# Altium PCB TrashFullnessSensor1.0.0.PcbDoc
Units mm, origin at the board's own origin, x right, y up, seen from the top; angles counter-clockwise.
Board outline 60.5 x 40.5 mm, 2 copper layers (Top Layer, Bottom Layer), stack 1.035 mm thick; 92 components, 82 nets, 263 pads, 87 vias.
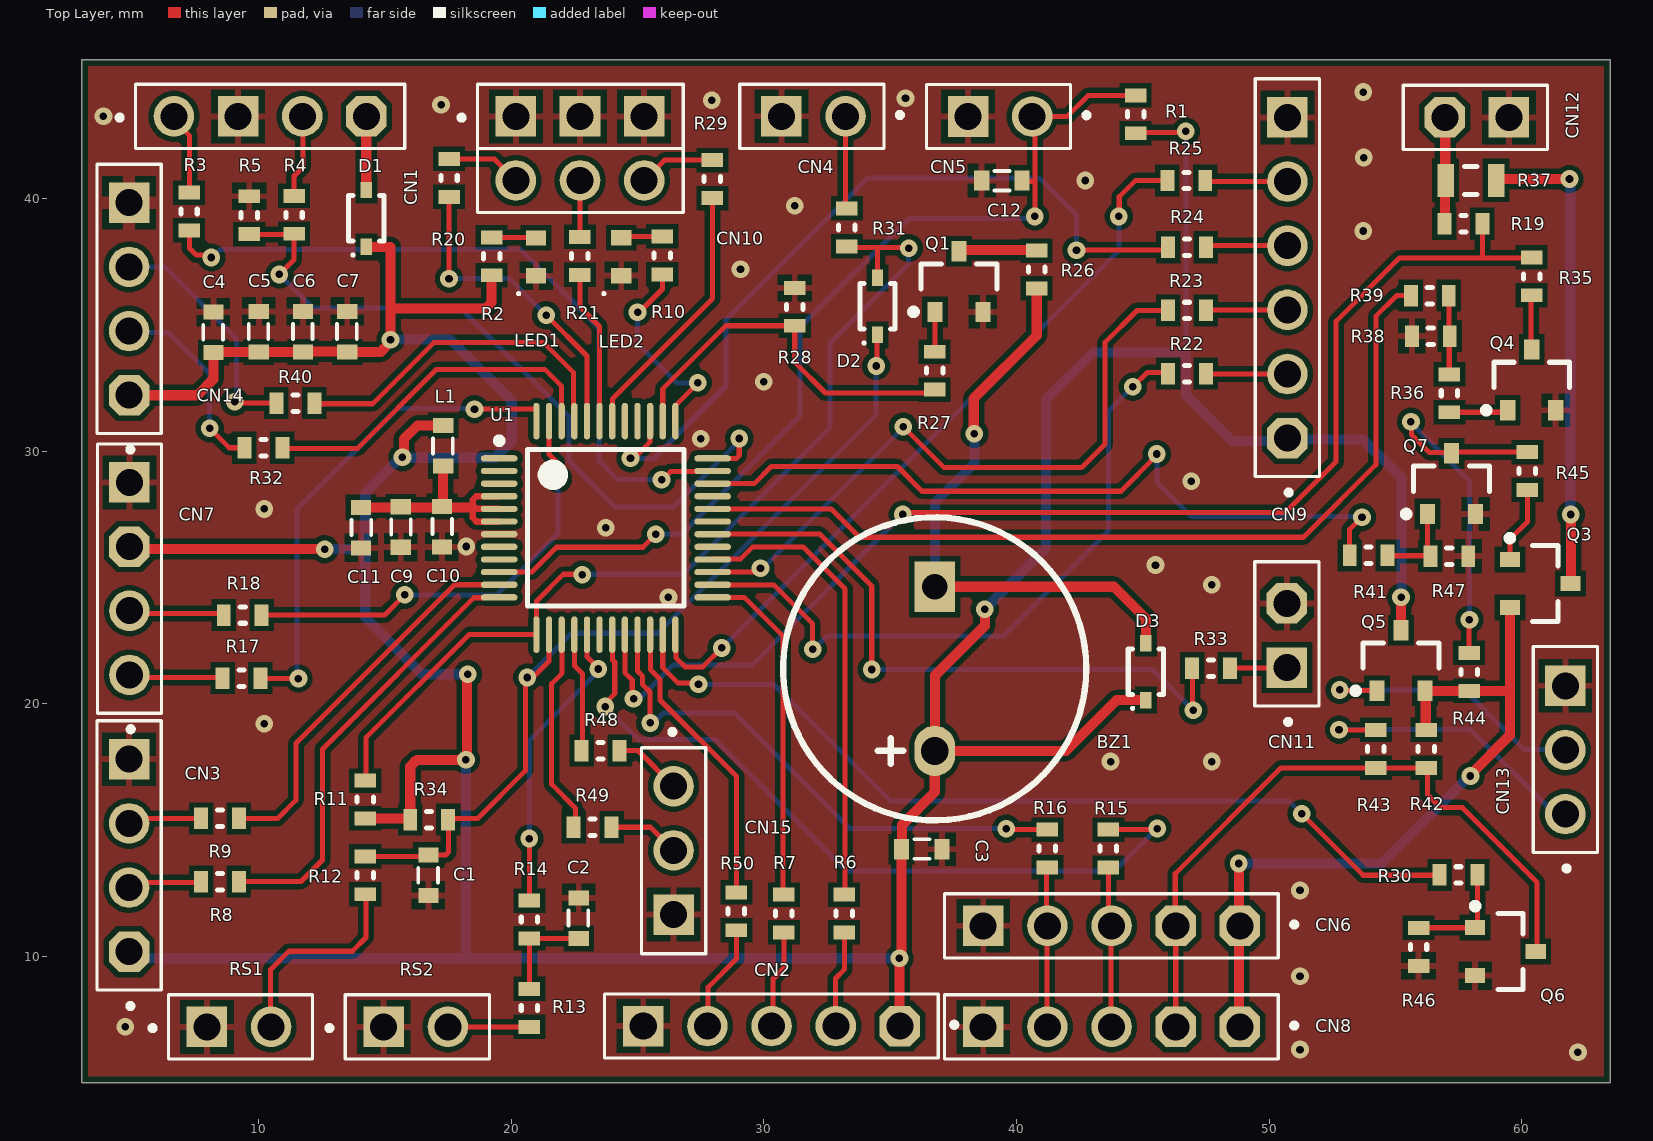
[diagram p0: Top Layer view]
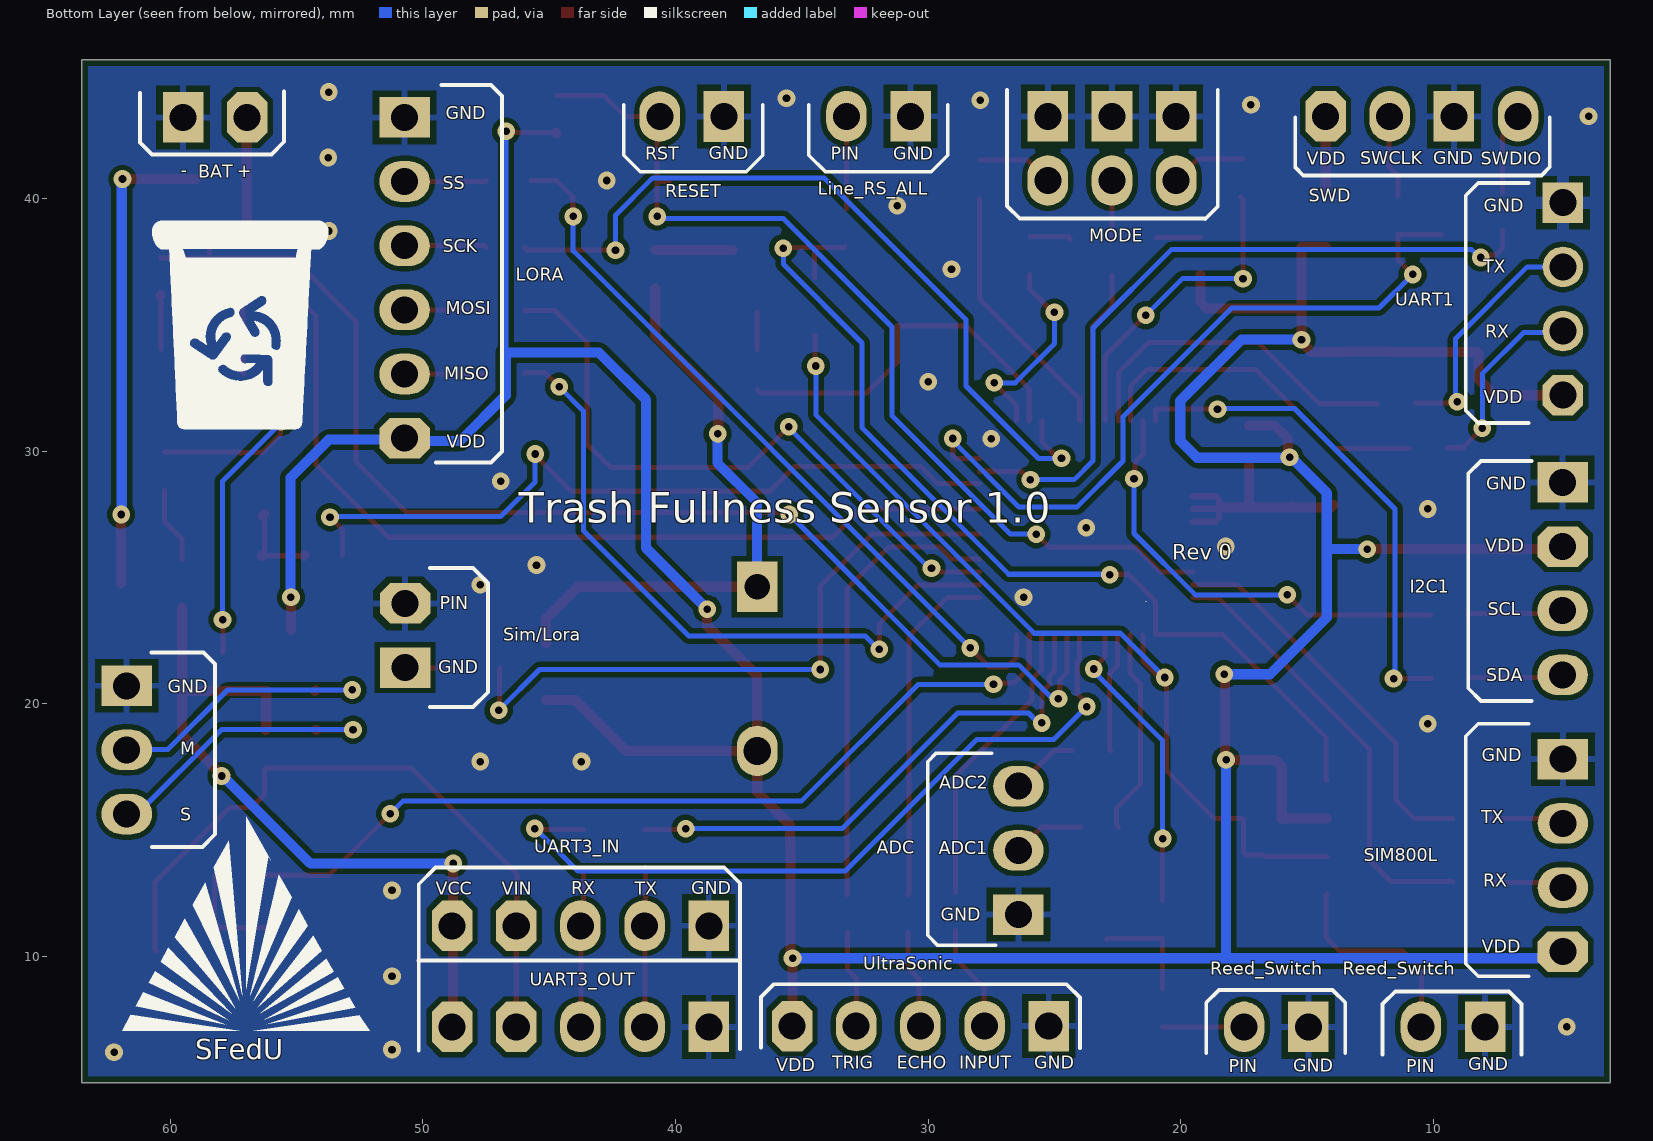
[diagram p1: Bottom Layer view, seen from below]

## Layer stack, top to bottom
Top Solder: solder mask 0.0102, Solder Resist, Dk 3.5
Top Layer: signal copper 0.0175
Dielectric 1: dielectric 1, FR-4, Dk 4.8
Bottom Layer: signal copper 0.0175
Bottom Solder: solder mask 0.0102, Solder Resist, Dk 3.5

## Board outline
3,5 3,45.5 63.5,45.5 63.5,5

## Design rules (kind name [scope] priority, off if disabled: settings)
BoardOutlineClearance [All] p1: gap=0.254 ignorepadtopadclearanceinfootprint=FALSE except(0: Arc-SplitContinuation Track-SplitContinuation SMDPad-SplitContinuation THPad-SplitContinuation Via-SplitContinuation Fill-SplitContinuation Poly-SplitContinuation Region-SplitContinuation Text-SplitContinuation)
Clearance [All] p1: gap=0.2 ignorepadtopadclearanceinfootprint=FALSE except(0: Arc-Hole Track-Hole SMDPad-Hole THPad-Hole Via-Hole Fill-Hole Poly-Hole Region-Hole Text-Hole)
ComponentClearance [All] p1: gap=0.5 collisioncheckmode=3 verticalgap=0.5 showdistances=FALSE
HoleSize [All] p1: absolutevalues=TRUE maxlimit=2.54 minlimit=0.3 maxpercent=80.000 minpercent=20.000
MinimumSolderMaskSliver [All] p1: minsoldermaskwidth=0.15
PolygonConnect PolygonConnect_BIG [IsPad And ( (AsMM(PadXSize_AllLayers)>1) Or (AsMM(PadYSize_AllLayers)>1) )] p1: connectstyle=Relief reliefconductorwidth=0.5 reliefentries=4 polygonreliefangle="90 Angle" airgapwidth=0.254
PolygonConnect PolygonConnect_VIA [IsVia] p2: connectstyle=Direct reliefconductorwidth=0.254 reliefentries=4 polygonreliefangle="90 Angle" airgapwidth=0.254
PolygonConnect [All] p3: connectstyle=Relief reliefconductorwidth=0.254 reliefentries=4 polygonreliefangle="90 Angle" airgapwidth=0.254
RoutingVias [All] p1: holewidth=0.3 width=0.7 viastyle="Through Hole" minholewidth=0.3 minwidth=0.7 maxholewidth=0.3 maxwidth=0.7
SilkToSolderMaskClearance [IsPad] p1: minsilkscreentomaskgap=0.1 clearancetoexposedcopper=TRUE
SolderMaskExpansion SolderMaskExpansion_VIA [IsVia] p1: expansion=0.102 istentingtop=TRUE
SolderMaskExpansion [All] p2: expansion=0.05 istentingtop=FALSE
UnRoutedNet [All] p1: checkbadconnections=TRUE
Width [All] p1: maxlimit=1 minlimit=0.2 preferedwidth=0.2 minimp=50.000000 maximp=50.000000 favimp=50.000000
25 further rules are at their usual default settings.

## Components (designator, comment, footprint, x,y, rotation, side; value= is the part's Value field where it differs from the comment)
BZ1 "BUZZER" BUZZER 36.763,21.391 r90 top
C1 "Capacitor" Cap_0603 16.722,13.221 r270 top
C2 "Capacitor" Cap_0603 22.672,11.521 r270 top
C3 "Capacitor" Cap_0603 36.25,14.25 r180 top
C4 "" Cap_0603 8.21,34.715 r270 top
C5 "Capacitor" Cap_0603 10.008,34.738 r270 top
C6 "Capacitor" Cap_0603 11.758,34.738 r270 top
C7 "Capacitor" Cap_0603 13.508,34.738 r270 top
C9 "Capacitor" Cap_0603 15.625,27.007 r90 top
C10 "Capacitor" Cap_0603 17.253,27.02 r90 top
C11 "Capacitor" Cap_0603 14.055,26.978 r90 top
C12 "Capacitor" Cap_0603 39.422,40.721 r0 top
CN1 "SWD" PIN_2.54_4_array#1 10.458,43.261 r0 top
CN2 "UltraSonic" Pin_2.54_5_Array#1 30.305,7.253 r180 top
CN3 "SIM800L" PIN_2.54_4_array#2 4.872,14.005 r90 top
CN4 "Line_RS_ALL" PIN_2.54_2_ARRAY#1 31.962,43.263 r180 top
CN5 "RESET" PIN_2.54_2_ARRAY#1 39.351,43.254 r180 top
CN6 "UART3_IN" Pin_2.54_5_Array#2 43.762,11.221 r180 top
CN7 "I2C1" PIN_2.54_4_array#3 4.888,24.962 r90 top
CN8 "UART3_OUT" Pin_2.54_5_Array#2 43.762,7.221 r180 top
CN9 "LORA" Pin_2.54_6_Array 50.722,36.871 r90 top
CN10 "MODE" Pin_2.54_3x2_Array 22.722,41.991 r0 top
CN11 "Sim/Lora" PIN_2.54_2_ARRAY#2 50.7,22.713 r90 top
CN12 "BAT" PIN_2.54_2_ARRAY#2 58.222,43.221 r180 top
CN13 "PIN_ARRAY_3" Pin_2.54_3_Array 61.722,18.181 r90 top
CN14 "UART1" PIN_2.54_4_array#4 4.873,36.032 r90 top
CN15 "ADC" Pin_2.54_3_Array 26.426,14.206 r270 top
D1 "D_SCHOTTKY" Diod_Shottky 14.262,39.221 r90 top
D2 "D_SCHOTTKY" Diod_Shottky 34.496,35.738 r90 top
D3 "D_SCHOTTKY" Diod_Shottky 45.122,21.28 r90 top
L1 "450 mA" Res_0603#1 17.306,30.219 r270 top
LED1 "LED" Led_0603_Red 20.981,37.701 r90 top
LED2 "LED" Led_0603_Red 24.353,37.703 r90 top
Q1 "MOS_N" SOT23-3 37.722,36.721 r90 top
Q3 "MOS_P" SOT23-3 60.727,24.765 r0 top
Q4 "MOS_N" SOT23-3 60.39,32.827 r90 top
Q5 "MOS_P" SOT23-3 55.222,21.721 r90 top
Q6 "MOS_N" SOT23-3 59.352,10.199 r0 top
Q7 "MOS_N" SOT23-3 57.222,28.721 r90 top
R1 "10 k" Res_0603#2 44.715,43.342 r270 top
R2 "300 Om" RES_0603 19.222,37.721 r90 top
R3 "100 Om" RES_0603 7.245,39.494 r270 top
R4 "100 Om" RES_0603 11.403,39.362 r270 top
R5 "10 k" Res_0603#2 9.631,39.347 r270 top
R6 "100 Om" Res_0603#2 33.178,11.707 r270 top
R7 "100 Om" Res_0603#2 30.792,11.707 r270 top
R8 "100 Om" Res_0603#2 8.472,12.971 r180 top
R9 "100 Om" Res_0603#2 8.472,15.471 r180 top
R10 "300 Om" RES_0603 25.977,37.754 r90 top
R11 "100 k" RES_0603 14.222,16.221 r90 top
R12 "300 Om" RES_0603 14.222,13.221 r270 top
R13 "300 Om" RES_0603 20.722,7.971 r270 top
R14 "300 Om" RES_0603 20.722,11.471 r90 top
R15 "100 Om" RES_0603 43.638,14.277 r270 top
R16 "100 Om" RES_0603 41.222,14.282 r270 top
R17 "100 Om" RES_0603 9.322,21.021 r180 top
R18 "100 Om" RES_0603 9.372,23.521 r180 top
R19 "10 k" RES_0603 57.686,39.008 r180 top
R20 "100 Om" RES_0603 17.537,40.824 r270 top
R21 "100 Om" RES_0603 22.714,37.737 r270 top
R22 "100 Om" RES_0603 46.747,33.078 r0 top
R23 "100 Om" RES_0603 46.747,35.578 r0 top
R24 "100 Om" RES_0603 46.747,38.078 r0 top
R25 "100 Om" RES_0603 46.722,40.721 r0 top
R26 "20 Om" RES_0603 40.799,37.196 r90 top
R27 "300 Om" RES_0603 36.76,33.193 r90 top
R28 "51 k" RES_0603 31.222,35.721 r270 top
R29 "100 Om" RES_0603 27.961,40.775 r270 top
R30 "100 Om" RES_0603 57.496,13.234 r0 top
R31 "100 Om" RES_0603 33.285,38.864 r90 top
R32 "100 Om" RES_0603 10.188,30.143 r180 top
R33 "100 Om" RES_0603 47.695,21.419 r0 top
R34 "50 k" RES_0603 16.752,15.425 r180 top
R35 "10 k" RES_0603 60.388,36.929 r90 top
R36 "300 Om" RES_0603 57.137,32.299 r270 top
R37 "1 Om" Res_0805 57.984,40.722 r0 top
R38 "10 k" RES_0603 56.396,34.561 r0 top
R39 "100 Om" RES_0603 56.356,36.162 r180 top
R40 "100 Om" RES_0603 11.458,31.907 r180 top
R41 "100 Om" RES_0603 53.938,25.883 r180 top
R42 "10 k" RES_0603 56.222,18.221 r270 top
R43 "1 k" RES_0603 54.222,18.221 r270 top
R44 "10 k" RES_0603 57.917,21.27 r90 top
R45 "1 k" RES_0603 60.222,29.221 r90 top
R46 "10 k" RES_0603 55.912,10.387 r90 top
R47 "10 k" RES_0603 57.129,25.851 r0 top
R48 "100 Om" RES_0603 23.536,18.156 r0 top
R49 "100 Om" RES_0603 23.222,15.121 r0 top
R50 "100 Om" RES_0603 28.913,11.796 r270 top
RS1 "Reed_Switch" PIN_2.54_2_ARRAY#3 9.222,7.221 r0 top
RS2 "Reed_Switch" PIN_2.54_2_ARRAY#3 16.222,7.221 r0 top
U1 "STM32G070" LQFP48 23.747,26.971 r0 top locked

## Footprints (in the part's own frame and the unit in brackets; to place one, negate y for a bottom-side part, rotate by r counter-clockwise, add the part's x,y. Pads: shape width x height; smd on the part's side, far side on the other; paste and mask are expansions set on the pad)
BUZZER [mm]
  oval 2x1.6 hole 1.1: 1(-3.25,0)
  rect 2x1.6 hole 1: 2(3.25,0)
  silkscreen extent -6,-6 6,6, body extent -6,-6 6,6, height 8.5
Cap_0603 [mm] "Chip Capacitor, 2-Leads, Body 1,60x0,80mm, IPC Medium Density"
  rect 0.6x0.8 smd: 1(-0.8,0) 2(0.8,0)
  silkscreen extent -0.3,-0.4 0.3,0.38, body extent -0.8,-0.4 0.8,0.4, height 0.5
Diod_Shottky [mm] "SODFL, 2-Leads, Body 1,25x2,50mm, IPC Medium Density"
  rect 0.65x0.45 smd: 1(-1.125,0) 2(1.125,0)
  silkscreen extent -1.5,-0.7 0.9,0.7, body extent -1.25,-0.67 1.25,0.67, height 1.1
Led_0603_Red [mm]
  rect 0.6x0.8 smd: 1(-0.75,0) 2(0.75,0)
  silkscreen extent -1.51,0.64 -1.41,0.74, body extent -0.85,-0.45 0.85,0.45, height 0.55
LQFP48 [mm] "TSQFP, 48-Leads, Body 7,00x7,00mm, Pitch 0,50mm, IPC Medium Density"
  oval 1.45x0.25 smd: 1(-4.225,2.75) 2(-4.225,2.25) 3(-4.225,1.75) 4(-4.225,1.25) 5(-4.225,0.75) 6(-4.225,0.25) 7(-4.225,-0.25) 8(-4.225,-0.75) 9(-4.225,-1.25) 10(-4.225,-1.75) 11(-4.225,-2.25) 12(-4.225,-2.75) 25(4.225,-2.75) 26(4.225,-2.25) 27(4.225,-1.75) 28(4.225,-1.25) 29(4.225,-0.75) 30(4.225,-0.25) 31(4.225,0.25) 32(4.225,0.75) 33(4.225,1.25) 34(4.225,1.75) 35(4.225,2.25) 36(4.225,2.75)
  oval 0.25x1.45 smd: 13(-2.75,-4.225) 14(-2.25,-4.225) 15(-1.75,-4.225) 16(-1.25,-4.225) 17(-0.75,-4.225) 18(-0.25,-4.225) 19(0.25,-4.225) 20(0.75,-4.225) 21(1.25,-4.225) 22(1.75,-4.225) 23(2.25,-4.225) 24(2.75,-4.225) 37(2.75,4.225) 38(2.25,4.225) 39(1.75,4.225) 40(1.25,4.225) 41(0.75,4.225) 42(0.25,4.225) 43(-0.25,4.225) 44(-0.75,4.225) 45(-1.25,4.225) 46(-1.75,4.225) 47(-2.25,4.225) 48(-2.75,4.225)
  silkscreen extent -4.35,-3.1 3.1,3.57, body extent -4.5,-4.5 4.5,4.5, height 1.6
PIN_2.54_2_ARRAY#1 [mm]
  round 1.605 / inner round 1.605 / far side oval 1.605x2 hole 1.07: 1(-1.27,0)
  rect 1.605x1.605 / inner rect 1.605x1.605 / far side rect 1.605x2 hole 1.07: 2(1.27,0)
  silkscreen extent -3.52,-1.27 2.92,1.27, body extent -2.56,-1.22 2.52,1.32, height 9.5
PIN_2.54_2_ARRAY#2 [mm]
  rect 1.605x1.605 / inner rect 1.605x1.605 / far side rect 1.605x2 hole 1.07: 1(-1.27,0)
  oct 1.605x1.605 / inner oct 1.605x1.605 / far side oct 1.605x2 hole 1.07: 2(1.27,0)
  silkscreen extent -3.52,-1.27 2.92,1.27, body extent -2.56,-1.22 2.52,1.32, height 9.5
PIN_2.54_2_ARRAY#3 [mm]
  rect 1.605x1.605 / inner rect 1.605x1.605 / far side rect 1.605x2 hole 1.07: 1(-1.27,0)
  round 1.605 / inner round 1.605 / far side oval 1.605x2 hole 1.07: 2(1.27,0)
  silkscreen extent -3.52,-1.27 2.92,1.27, body extent -2.56,-1.22 2.52,1.32, height 9.5
Pin_2.54_3_Array [mm]
  round 1.605 / inner round 1.605 / far side oval 1.605x2 hole 1.07: 1(-2.54,0) 2(0,0)
  rect 1.605x1.605 / inner rect 1.605x1.605 / far side rect 1.605x2 hole 1.07: 3(2.54,0)
  silkscreen extent -4.79,-1.27 4.09,1.27, body extent -3.81,-1.27 3.81,1.27, height 9.5
Pin_2.54_3x2_Array [mm]
  rect 1.605x1.605 / inner rect 1.605x1.605 / far side rect 1.605x2 hole 1.07: 1(-2.54,1.27) 2(0,1.27) 3(2.54,1.27)
  round 1.605 / inner round 1.605 / far side oval 1.605x2 hole 1.07: 4(-2.54,-1.27) 5(0,-1.27) 6(2.54,-1.27)
  silkscreen extent -4.79,-2.54 4.09,2.54, body extent -3.81,-2.55 3.81,2.54, height 9.5
PIN_2.54_4_array#1 [mm]
  round 1.605 / inner round 1.605 / far side oval 1.605x2 hole 1.07: 1(-3.81,0) 3(1.27,0)
  rect 1.605x1.605 / inner rect 1.605x1.605 / far side rect 1.605x2 hole 1.07: 2(-1.27,0)
  oct 1.605x1.605 / inner oct 1.605x1.605 / far side oct 1.605x2 hole 1.07: 4(3.81,0)
  silkscreen extent -6.06,-1.27 5.33,1.27, body extent -5.08,-1.27 5.08,1.27, height 9.5
PIN_2.54_4_array#2 [mm]
  oct 1.605x1.605 / inner oct 1.605x1.605 / far side oct 1.605x2 hole 1.07: 1(-3.81,0)
  round 1.605 / inner round 1.605 / far side oval 1.605x2 hole 1.07: 2(-1.27,0) 3(1.27,0)
  rect 1.605x1.605 / inner rect 1.605x1.605 / far side rect 1.605x2 hole 1.07: 4(3.81,0)
  silkscreen extent -6.06,-1.27 5.33,1.27, body extent -5.08,-1.27 5.08,1.27, height 9.5
PIN_2.54_4_array#3 [mm]
  round 1.605 / inner round 1.605 / far side oval 1.605x2 hole 1.07: 1(-3.81,0) 2(-1.27,0)
  oct 1.605x1.605 / inner oct 1.605x1.605 / far side oct 1.605x2 hole 1.07: 3(1.27,0)
  rect 1.605x1.605 / inner rect 1.605x1.605 / far side rect 1.605x2 hole 1.07: 4(3.81,0)
  silkscreen extent -6.06,-1.27 5.33,1.27, body extent -5.08,-1.27 5.08,1.27, height 9.5
PIN_2.54_4_array#4 [mm]
  oct 1.605x1.605 hole 1.07: 1(-3.81,0)
  round 1.605 hole 1.07: 2(-1.27,0) 3(1.27,0)
  rect 1.605x1.605 hole 1.07: 4(3.81,0)
  silkscreen extent -6.06,-1.27 5.33,1.27, body extent -5.08,-1.27 5.08,1.27, height 9.5
Pin_2.54_5_Array#1 [mm]
  oct 1.605x1.605 / inner oct 1.605x1.605 / far side oct 1.605x2 hole 1.07: 1(-5.08,0)
  round 1.605 / inner round 1.605 / far side oval 1.605x2 hole 1.07: 2(-2.54,0) 3(0,0) 4(2.54,0)
  rect 1.605x1.605 / inner rect 1.605x1.605 / far side rect 1.605x2 hole 1.07: 5(5.08,0)
  silkscreen extent -7.33,-1.27 6.61,1.27, body extent -6.35,-1.27 6.35,1.27, height 9.5
Pin_2.54_5_Array#2 [mm]
  oct 1.605x1.605 / inner oct 1.605x1.605 / far side oct 1.605x2 hole 1.07: 1(-5.08,0) 2(-2.54,0)
  round 1.605 / inner round 1.605 / far side oval 1.605x2 hole 1.07: 3(0,0) 4(2.54,0)
  rect 1.605x1.605 / inner rect 1.605x1.605 / far side rect 1.605x2 hole 1.07: 5(5.08,0)
  silkscreen extent -7.33,-1.27 6.61,1.27, body extent -6.35,-1.27 6.35,1.27, height 9.5
Pin_2.54_6_Array [mm]
  oct 1.605x1.605 / inner oct 1.605x1.605 / far side oct 1.605x2 hole 1.07: 1(-6.35,0)
  round 1.605 / inner round 1.605 / far side oval 1.605x2 hole 1.07: 2(-3.81,0) 3(-1.27,0) 4(1.27,0) 5(3.81,0)
  rect 1.605x1.605 / inner rect 1.605x1.605 / far side rect 1.605x2 hole 1.07: 6(6.35,0)
  silkscreen extent -8.6,-1.27 7.88,1.27, body extent -7.62,-1.27 7.62,1.27, height 9.5
Res_0603#1 [mm] "Chip Resistor, 2-Leads, Body 1,60x0,80mm, IPC Medium Density"
  rect 0.6x0.8 smd: 1(-0.8,0) 2(0.8,0)
  silkscreen extent -0.3,-0.4 0.3,0.38, body extent -0.8,-0.4 0.8,0.4, height 0.5
Res_0603#2 [mm] "Chip Resistor, 2-Leads, Body 1,60x0,80mm, IPC Medium Density"
  rect 0.55x0.85 smd: 1(-0.75,0) 2(0.75,0)
  silkscreen extent -0.1,-0.33 0.1,0.33, body extent -0.8,-0.4 0.8,0.4, height 0.45
RES_0603 [mm] "Chip Resistor, 2-Leads, Body 1,60x0,80mm, IPC Medium Density"
  rect 0.55x0.85 smd: 1(-0.75,0) 2(0.75,0)
  silkscreen extent -0.1,-0.33 0.1,0.33, body extent -0.8,-0.4 0.8,0.4, height 0.45
Res_0805 [mm] "Chip Resistor, 2-Leads, Body 2,00x1,25mm, IPC Medium Density"
  rect 0.65x1.3 smd: 1(-1,0) 2(1,0)
  silkscreen extent -0.25,-0.55 0.25,0.55, body extent -1,-0.63 1,0.63, height 0.5
SOT23-3 [mm] "SOT23, 3-Leads, Body 2,92x2,37mm, Pitch 0,95mm, IPC Medium Density"
  rect 0.8x0.6 smd: 1(-1.2,0.95) 2(-1.2,-0.95) 3(1.2,0)
  silkscreen extent -1.32,-1.5 0.7,1.92, body extent -1.32,-1.52 1.32,1.52, height 1.11

## Part data
C1 C2 C3 C5 C6 C7 C9 C10 C11 C12: Voltage=16v
  C1 C2 C3 C6 C7 C10 C12: Сapacity=0.1u
  C5 C9 C11: Сapacity=10u
C4: library part Capacitor, Voltage=16v, Сapacity=10u
CN1 CN3 CN7 CN14: library part PIN_ARRAY_4
CN2 CN6 CN8: library part PIN_ARRAY_5
CN4 CN5 CN11 CN12: library part PIN_ARRAY_2
CN9: library part PIN_ARRAY_6
CN10: library part PIN_ARRAY_3x2
CN15: library part PIN_ARRAY_3
D1 D2 D3: library part Diod_Shottky, Voltage=20v
L1: library part Filter, "BLM18BB221SN1D"
R1 R2 R3 R4 R5 R6 R7 R8 R9 R10 R11 R12 R13 R14 R15 R16 R17 R18 R19 R20 R21 R22 R23 R24 R25 R26 R27 R28 R29 R30 R31 R32 R33 R34 R35 R36 R37 R38 R39 R40 R41 R42 R43 R44 R45 R46 R47 R48 R49 R50: library part Resistor

## Via types
v1: diameter 0.7, hole 0.3, Top Layer to Bottom Layer, tented both sides, 87 vias

## Nets (pads, with @x,y where several pads share a name; then routed paths per layer and width w, separated by ;. In a path a pad name is that pad's centre, name@x,y a point inside that pad or via, vN(x,y) a via of type N, cw(c..) or ccw(c..) an arc to the next point about the centre after c; other vN are vias at no path point)
+3v: CN12.2 R19.2 R37.1 | length 4.5
  Top Layer w0.4: CN12.2@56.761,43.031 CN12.2 56.968,43.205 56.968,40.739 R37.1 56.96,40.699 56.96,39.031 R19.2
ADC1: R49.1 U1.15 | length 8.2
  Top Layer w0.2: U1.15 22.006,22.737 22.006,22.101 22.015,22.092 22.015,21.218 21.599,20.802 21.599,16.823 22.536,15.885 22.536,15.186 R49.1
ADC2: R48.1 U1.16 | length 4.7
  Top Layer w0.2: U1.16 22.502,22.741 22.502,21.513 22.822,21.192 22.822,18.192 R48.1
BAT_LEVEL: R19.1 R35.2 U1.20 | length 50.1
  Top Layer w0.2: U1.20 24.496,21.24 24.789,20.948 24.789,20.263 v1(24.842,20.209) ; v1(35.5,27.5) 35.571,27.571 50.628,27.571 52.653,29.596 52.653,35.152 55.158,37.658 60.367,37.658 R35.2 ; R19.1 58.436,37.705 58.483,37.658
  Bottom Layer w0.2: v1(24.842,20.209) 24.938,20.305 25.173,20.305 26.417,21.549 29.536,21.549 v1@35.487,27.5
BUZZER: R27.1 R28.2 U1.38 | length 15.1
  Top Layer w0.2: U1.38@25.987,31.206 U1.38 25.997,32.474 28.493,34.971 R28.2 31.222,33.522 32.435,32.308 36.625,32.308 R27.1
CALIB: R14.2 U1.17 | length 11.8
  Top Layer w0.2: v1(20.714,14.673) 20.714,12.229 R14.2 ; U1.17 23.006,22.737 23.006,21.863 23.446,21.423 v1(23.446,21.385)
  Bottom Layer w0.2: v1(20.714,14.673) 20.714,18.55 23.446,21.282 v1(23.446,21.385)
COMMON_LINE: D2.2 R11.2 R31.1 U1.13 | length 38
  Top Layer w0.2: R11.2 14.242,16.992 14.242,18.661 18.327,22.746 U1.13 ; U1.13 20.996,24.07 22.061,25.135 22.79,25.135 v1(22.81,25.116) ; R31.1 33.322,38.077 34.496,38.077 ; D2.2 34.496,38.077 ; v1(35.733,38.045) 35.702,38.077 34.496,38.077
  Bottom Layer w0.2: v1(22.81,25.116) 22.829,25.135 26.81,25.135 32.613,30.939 32.613,34.29 35.719,37.395 35.719,38.031 v1(35.733,38.045)
Door: C1.1 D2.1 R12.1 R34.1 U1.14 | length 35.7
  Top Layer w0.2: R12.1 16.672,13.971 C1.1 17.407,14.021 17.524,14.138 R34.1@17.524,15.403 ; R34.1 R34.1@17.524,15.403 ; U1.14@21.497,22.731 21.497,21.688 20.953,21.145 20.732,21.145 20.558,20.971 20.558,17.353 18.664,15.459 17.581,15.459 R34.1@17.524,15.403 ; v1(34.445,33.379) 34.471,33.404 34.471,34.588 D2.1
  Bottom Layer w0.2: v1(20.636,21.049) 22.387,22.8 25.8,22.8 34.444,31.444 v1(34.445,33.379)
ECHO: R7.1 U1.25 | length 13.7
  Top Layer w0.2: U1.25 29.222,24.221 30.763,22.68 30.763,12.486 R7.1
GND: C1.2 C2.1 C3.1 C4.1 C5.1 C6.1 C7.1 C9.1 C10.1 C11.1 C12.1 CN1.2 CN2.5 CN3.4 CN4.2 CN5.2 CN6.5 CN7.4 CN8.5 CN9.6 CN10.1 CN10.2 CN10.3 CN11.2 CN12.1 CN13.3 CN14.4 CN15.3 LED1.1 LED2.1 Q1.2 Q4.2 Q6.2 Q7.2 R5.1 R28.1 R38.1 R46.1 R47.2 RS1.1 RS2.1 U1.7 | length 0
  Top Layer w0.2: RS1.1 RS1.1@7.972,7.201
  other v1: 62.222,6.221 51.222,6.321 4.722,7.221 51.222,9.221 51.222,12.621 43.722,17.721 47.722,17.721 10.222,19.221 26.222,24.221 47.722,24.721 45.5,25.5 18.221,26.235 23.747,26.971 10.222,27.721 46.922,28.821 27.5,30.5 30,32.75 29.074,37.207 53.722,38.721 31.222,39.721 42.722,40.721 53.744,41.629 3.857,43.262 17.222,43.721 27.936,43.894 35.605,43.977 53.722,44.221
I2C1_SCL: R18.1 U1.47 | length 17.7
  Top Layer w0.2: R18.1 14.988,23.521 v1(15.789,24.322) ; U1.47 21.497,29.88 21.815,29.561 21.815,28.948 v1(21.852,28.911)
  Bottom Layer w0.2: v1(15.789,24.322) 19.423,24.322 21.852,26.752 v1(21.852,28.911)
I2C1_SDA: R17.1 U1.48 | length 19.8
  Top Layer w0.2: R17.1 10.087,21.006 v1(11.577,21.006) ; v1(18.546,31.668) 20.973,31.668 20.997,31.645 U1.48
  Bottom Layer w0.2: v1(11.577,21.006) 11.522,21.061 11.522,27.721 15.497,31.696 18.518,31.696 v1(18.546,31.668)
INPUT: R50.1 U1.22 | length 11.5
  Top Layer w0.2: U1.22@25.493,22.661 25.506,22.648 25.506,22.101 25.51,22.097 25.51,21.358 25.892,20.976 25.892,20.159 28.913,17.138 R50.1
"KEY 1": R36.1 R38.2 R39.1 | length 3.1
  Top Layer w0.2: R36.1@57.075,33.064 57.128,33.117 57.128,34.542 R38.2 ; R38.2@57.126,34.58 R39.1@57.126,36.142
  Top Layer w0.4: R39.1 R39.1@57.126,36.142 ; R38.2@57.126,34.58 R38.2
"KEY 2": Q7.1 R41.1 R47.1 | length 3.4
  Top Layer w0.2: R41.1@54.704,25.867 56.267,25.867 R47.1@56.363,25.867 ; R47.1@56.267,25.963 Q7.1@56.267,27.517
  Top Layer w0.4: R41.1 R41.1@54.704,25.867 ; Q7.1 Q7.1@56.354,27.439 ; R47.1@56.363,25.867 R47.1
"KEY 3": R30.1 U1.23 | length 35.4
  Top Layer w0.2: U1.23 25.997,21.437 26.611,20.823 27.365,20.823 v1(27.412,20.776) ; v1(51.287,15.656) 53.722,13.221 R30.1@56.696,13.221
  Bottom Layer w0.2: v1(27.412,20.776) 30.396,20.776 35.006,16.165 50.778,16.165 v1(51.287,15.656)
MODE1: R20.2 U1.44 | length 12.6
  Top Layer w0.2: v1(17.535,36.835) 17.535,39.969 R20.2@17.629,40.063 ; v1(21.385,35.387) 22.996,33.775 U1.44
  Bottom Layer w0.2: v1(17.535,36.835) 19.937,36.835 v1(21.385,35.387)
MODE2: R21.2 U1.43 | length 6.1
  Top Layer w0.2: R21.2@22.722,36.971 22.722,35.719 23.497,34.944 U1.43
MODE3: R29.2 U1.42 | length 10.5
  Top Layer w0.2: U1.42 24.006,31.206 24.006,32.08 27.973,36.047 R29.2@27.973,40.013
NetBZ1_2: BZ1.2 D3.2 R26.1 | length 22.9
  Top Layer w0.4: BZ1.2 43.859,24.641 45.122,23.378 D3.2 ; v1(38.332,30.693) 38.307,30.718 38.307,32.097 40.799,34.588 R26.1
  Bottom Layer w0.4: BZ1.2@36.722,25.077 36.772,25.128 36.772,27.973 38.332,29.533 v1(38.332,30.693)
NetC2_2: C2.2 R13.1 R14.1 | length 4.2
  Top Layer w0.2: R13.1 R14.1 22.897,10.721 C2.2@22.929,10.689
NetCN1_4: CN1.4 D1.2 | length 2.4
  Top Layer w0.2: CN1.4@14.262,42.681 CN1.4@14.282,42.701 ; CN1.4@14.262,42.721 CN1.4@14.282,42.701 ; CN1.4@14.292,42.691 CN1.4@14.282,42.701 ; CN1.4@14.302,42.721 CN1.4@14.282,42.701
  Top Layer w0.4: D1.2 CN1.4@14.262,42.681
NetCN2_2: CN2.2 R6.2 | length 3.9
  Top Layer w0.2: CN2.2@32.838,7.26 32.838,9.135 33.198,9.495 33.198,10.937 R6.2
NetCN2_3: CN2.3 R7.2 | length 3.9
  Top Layer w0.2: CN2.3 30.357,7.305 30.357,9.114 30.792,9.549 R7.2
NetCN2_4: CN2.4 R50.2 | length 4.3
  Top Layer w0.2: CN2.4 27.793,7.28 27.793,8.792 28.913,9.912 R50.2
NetCN3_2: CN3.2 R8.2 | length 2.9
  Top Layer w0.2: CN3.2@4.872,12.931 7.682,12.931 R8.2
NetCN3_3: CN3.3 R9.2 | length 2.8
  Top Layer w0.2: CN3.3@4.872,15.471 R9.2
NetCN4_1: CN4.1 R31.2 | length 3.6
  Top Layer w0.2: R31.2@33.232,39.614 CN4.1
NetCN6_3: CN6.3 CN8.3 R15.2 | length 6.3
  Top Layer w0.2: R15.2@43.638,13.477 43.638,11.325 43.742,11.221 43.742,7.241 CN8.3
NetCN6_4: CN6.4 CN8.4 R16.2 | length 6.1
  Top Layer w0.2: CN6.4@41.182,10.721 41.202,10.701 41.202,7.241 CN8.4 ; R16.2@41.182,13.532 41.182,11.261 CN6.4
  Top Layer w0.4: CN8.4@40.84,7.189 CN8.4@41.04,7.389
NetCN7_1: CN7.1 R17.2 | length 3.7
  Top Layer w0.2: CN7.1@4.888,21.049 8.544,21.049 R17.2
NetCN7_2: CN7.2 R18.2 | length 3.8
  Top Layer w0.2: CN7.2@4.888,23.589 8.554,23.589 R18.2
NetCN9_2: CN9.2 R22.2 | length 3.2
  Top Layer w0.2: R22.2 47.514,33.061 CN9.2
NetCN9_3: CN9.3 R23.2 | length 3.2
  Top Layer w0.2: R23.2 47.521,35.601 CN9.3
NetCN9_4: CN9.4 R24.2 | length 3.3
  Top Layer w0.2: R24.2 47.561,38.141 CN9.4
NetCN9_5: CN9.5 R25.2 | length 3.3
  Top Layer w0.2: R25.2 47.512,40.681 CN9.5
NetCN10_4: CN10.4 R20.1 | length 3.3
  Top Layer w0.2: R20.1@17.537,41.563 19.339,41.563 CN10.4 CN10.4@19.862,40.721
NetCN10_5: CN10.5 R21.1 | length 2.2
  Top Layer w0.2: R21.1 CN10.5@22.714,40.714
NetCN10_6: CN10.6 R29.1 | length 3
  Top Layer w0.2: CN10.6 26.072,41.531 R29.1@27.955,41.531
NetCN11_1: CN11.1 R33.2 | length 2.3
  Top Layer w0.2: R33.2 50.689,21.419 CN11.1@50.722,21.451
NetCN13_1: CN13.1 R43.1 | length 11.9
  Top Layer w0.2: v1@52.772,18.978 R43.1@54.214,18.978
  Top Layer w0.4: v1(52.764,18.985) v1@52.772,18.978 ; R43.1@54.214,18.978 R43.1 ; CN13.1@61.675,15.595 CN13.1
  Bottom Layer w0.2: v1(52.764,18.985) 57.967,18.985 61.231,15.721 61.642,15.721 CN13.1
NetCN13_2: CN13.2 Q5.1 | length 11.4
  Top Layer w0.2: v1@52.806,20.539 Q5.1@54.253,20.539
  Top Layer w0.4: v1(52.788,20.557) v1@52.806,20.539 ; Q5.1@54.253,20.539 Q5.1
  Bottom Layer w0.2: v1(52.788,20.557) 57.733,20.557 60.094,18.196 61.707,18.196 CN13.2
NetCN14_2: CN14.2 R32.2 | length 7.7
  Top Layer w0.2: v1(8.061,30.918) 8.836,30.143 R32.2
  Bottom Layer w0.2: CN14.2 4.928,34.707 6.425,34.707 8.061,33.071 v1(8.061,30.918)
NetCN14_3: CN14.3 R40.2 | length 9.8
  Top Layer w0.2: CN14.3 CN14.3@4.994,37.181 ; v1(9.052,31.959) 9.104,31.907 R40.2
  Bottom Layer w0.2: CN14.3 6.282,37.302 9.117,34.468 9.117,32.023 v1(9.052,31.959)
NetCN15_1: CN15.1 R48.2 | length 2.7
  Top Layer w0.2: R48.2 25.016,18.156 CN15.1
NetCN15_2: CN15.2 R49.2 | length 2.8
  Top Layer w0.2: R49.2 25.511,15.121 CN15.2
NetLED1_2: LED1.2 R2.2 | length 1.8
  Top Layer w0.2: R2.2@19.228,38.464 LED1.2@20.981,38.464
NetLED2_2: LED2.2 R10.2 | length 1.6
  Top Layer w0.2: LED2.2@24.364,38.374 LED2.2@24.425,38.434 ; LED2.2@24.416,38.504 R10.2
NetQ1_1: Q1.1 R27.2 | length 1.5
  Top Layer w0.2: R27.2@36.772,34.007 Q1.1
NetQ1_3: Q1.3 R26.2 | length 3.1
  Top Layer w0.4: Q1.3@37.721,37.971 R26.2@40.799,37.971
NetQ3_1: Q3.1 R45.1 | length 3
  Top Layer w0.2: Q3.1 59.527,26.518 60.222,27.212 R45.1
NetQ3_3: Q3.3 R37.2 | length 18.9
  Top Layer w0.4: R37.2@58.984,40.78 v1(61.888,40.78) ; Q3.3@61.943,24.781 v1(61.943,27.5)
  Bottom Layer w0.4: v1(61.888,40.78) 61.916,40.752 61.916,27.527 v1(61.943,27.5)
NetQ4_1: Q4.1 R36.2 | length 2.3
  Top Layer w0.2: R36.2 59.362,31.549 Q4.1
NetQ4_3: Q4.3 R35.1 | length 2.2
  Top Layer w0.2: Q4.3@60.372,34.027 R35.1@60.372,36.163
  Top Layer w0.4: R35.1@60.372,36.163 R35.1
NetQ6_1: Q6.1 R30.2 R46.2 | length 4.4
  Top Layer w0.2: R46.2@55.918,11.143 Q6.1@58.146,11.143 ; Q6.1@58.241,11.238 R30.2@58.241,13.229
  Top Layer w0.4: R46.2 R46.2@55.918,11.143 ; Q6.1@58.146,11.143 Q6.1 Q6.1@58.241,11.238
NetQ7_3: Q7.3 R44.2 R45.2 | length 15.5
  Top Layer w0.2: v1(55.612,31.171) 55.629,31.154 55.629,30.668 56.338,29.959 57.184,29.959 Q7.3 57.272,29.971 R45.2 ; R44.2 57.917,23.332 v1(57.926,23.34)
  Bottom Layer w0.2: v1(55.612,31.171) 55.612,31.134 57.926,28.821 v1(57.926,23.34)
NetR3_2: R3.2 U1.35 | length 28.7
  Top Layer w0.2: R3.2 7.267,38.723 7.267,38.037 7.534,37.77 8.035,37.77 v1(8.13,37.674) ; v1(25.95,28.881) 25.992,28.881 26.317,29.206 27.321,29.206 27.327,29.212 27.962,29.212 U1.35
  Bottom Layer w0.2: v1(8.13,37.674) 8.176,37.674 8.498,37.996 20.359,37.996 23.471,34.884 23.471,29.628 24.219,28.881 v1(25.95,28.881)
NetR4_2: R4.2 R5.2 U1.36 | length 29.5
  Top Layer w0.2: R5.2@9.674,38.581 11.372,38.581 R4.2 ; v1(10.821,37.003) 11.403,37.586 R4.2@11.403,38.537 ; U1.36 28.908,29.721 29.025,29.838 v1@29.025,30.507
  Bottom Layer w0.2: v1(10.821,37.003) 12.151,35.672 17.985,35.672 22.289,31.368 22.289,29.62 24.117,27.792 26.402,27.792 29.024,30.415 v1(29.024,30.508)
NetR12_2: R12.2 RS1.2 | length 8.3
  Top Layer w0.2: RS1.2 10.468,7.244 10.468,9.485 11.196,10.212 13.707,10.212 14.251,10.756 14.251,12.441 R12.2
NetR13_2: R13.2 RS2.2 | length 3.2
  Top Layer w0.2: RS2.2 R13.2
NetR39_2: R39.2 U1.32 | length 35.5
  Top Layer w0.2: U1.32 32.662,27.721 33.783,26.6 51.355,26.6 54.222,29.467 54.222,35.347 55.036,36.162 R39.2
NetR41_2: R41.2 U1.34 | length 30.4
  Top Layer w0.2: U1.34 29.616,28.721 30.292,29.398 35.286,29.398 36.262,28.422 44.131,28.422 45.552,29.842 v1(45.552,29.895) ; R41.2 53.188,26.917 53.667,27.396 v1(53.675,27.396)
  Bottom Layer w0.2: v1(45.552,29.895) 45.552,28.79 46.928,27.413 53.657,27.413 v1(53.675,27.396)
NRST: C12.2 CN5.1 R1.1 U1.10 | length 37.4
  Top Layer w0.2: U1.10 20.812,25.221 21.795,26.204 25.204,26.204 v1(25.722,26.721) ; C12.2 40.251,40.691 40.723,40.691 ; CN5.1@40.664,43.261 42.006,43.261 42.833,44.088 44.711,44.088 R1.1 ; CN5.1@40.722,42.701 40.723,42.7 40.723,40.691 ; v1(40.723,39.299) 40.723,40.691
  Bottom Layer w0.2: v1(25.722,26.721) 26.742,26.721 31.433,31.412 31.433,34.922 35.732,39.221 40.645,39.221 v1(40.723,39.299)
S/L: R33.1 U1.30 | length 25.5
  Top Layer w0.2: U1.30 32.222,26.721 34.27,24.673 v1(34.27,21.365) ; R33.1 46.973,21.391 46.973,19.777 v1(47,19.75)
  Bottom Layer w0.2: v1(34.27,21.365) 45.385,21.365 v1(47,19.75)
SPI2_MISO: R22.1 U1.26 | length 27
  Top Layer w0.2: U1.26 27.975,24.718 30.388,24.718 31.932,23.174 v1(31.932,22.172) ; v1(44.605,32.552) 45.168,33.115 45.96,33.115 R22.1
  Bottom Layer w0.2: v1(31.932,22.172) 31.968,22.172 32.48,22.685 39.466,22.685 43.641,26.86 43.641,31.588 v1(44.605,32.552)
SPI2_MOSI: R23.1 U1.27 | length 26
  Top Layer w0.2: U1.27@27.972,25.222 29.582,25.222 29.731,25.371 v1(29.867,25.371) ; v1(35.515,30.977) 37.137,29.355 42.575,29.355 43.507,30.288 43.507,34.32 44.765,35.578 R23.1@45.947,35.578
  Bottom Layer w0.2: v1(29.867,25.371) 29.954,25.371 35.515,30.932 v1(35.515,30.977)
SPI2_SCK: R24.1 U1.39 | length 31.3
  Top Layer w0.2: v1(24.722,29.721) 24.84,29.721 25.496,30.377 U1.39 ; v1(42.374,37.964) 45.884,37.964 R24.1
  Bottom Layer w0.2: v1(24.722,29.721) 25.632,29.721 28.5,32.59 28.5,35.21 34.117,40.827 40.897,40.827 42.374,39.35 v1(42.374,37.964)
SPI2_SS: R25.1 U1.24 | length 29.5
  Top Layer w0.2: U1.24 26.506,22.737 26.506,22.101 26.513,22.094 26.513,21.834 26.875,21.472 27.58,21.472 v1(28.327,22.22) ; v1(44.047,39.299) 44.066,39.318 44.066,40.081 44.714,40.729 R25.1@45.714,40.729
  Bottom Layer w0.2: v1@28.332,22.22 44.047,37.935 v1(44.047,39.299)
SWCLK: CN1.3 R4.1 | length 3.3
  Top Layer w0.2: R4.1 11.403,40.903 11.762,41.261 CN1.3@11.762,43.261
SWDIO: CN1.1 R3.1 | length 3.3
  Top Layer w0.2: CN1.1 6.648,43.112 7.27,42.49 7.27,40.269 R3.1
TRIG: R6.1 U1.28 | length 18.2
  Top Layer w0.2: U1.28 27.981,25.731 29.067,25.731 29.557,26.221 31.546,26.221 33.21,24.557 R6.1@33.21,12.457
UART1_RX: R32.1 U1.46 | length 14
  Top Layer w0.2: R32.1@10.938,30.121 13.922,30.121 17.045,33.244 21.327,33.244 21.996,32.575 U1.46
UART1_TX: R40.1 U1.45 | length 13.7
  Top Layer w0.2: R40.1@12.208,31.885 14.516,31.885 16.935,34.304 21.283,34.304 22.472,33.116 U1.45@22.472,31.196
UART3_RX: R15.1 U1.19 | length 30.2
  Top Layer w0.2: v1@23.721,19.912 23.721,20.033 24.096,20.409 24.096,21.654 24.006,21.744 24.006,22.737 U1.19 ; R15.1 45.524,15.027 v1(45.567,15.07)
  Bottom Layer w0.2: v1(23.721,19.898) 25.02,18.6 28.065,18.6 33.277,13.388 43.865,13.388 45.547,15.07 v1(45.567,15.07)
UART3_TX: R16.1 U1.21 | length 21.7
  Top Layer w0.2: U1.21 24.997,21.306 25.189,21.114 25.189,20.782 25.492,20.478 25.492,19.993 25.5,19.985 v1(25.5,19.25) ; v1(39.596,15.064) v1@39.596,15.032 ; R16.1 v1@39.596,15.032 ; v1@39.596,15.032 39.545,15.032 39.596,14.982 v1@39.596,15.032
  Bottom Layer w0.2: v1(25.5,19.25) 25.635,19.25 26.026,19.641 28.828,19.641 33.405,15.064 v1(39.596,15.064)
UART4_RX: R8.1 U1.12 | length 17.5
  Top Layer w0.2: R8.1 11.677,12.971 12.527,13.822 12.527,18.212 18.52,24.205 18.87,24.205 18.877,24.212 19.512,24.212 U1.12
UART4_TX: R9.1 U1.11 | length 15.4
  Top Layer w0.2: R9.1 10.756,15.471 11.472,16.186 11.472,18.436 17.755,24.719 19.52,24.719 U1.11
USER_LED: R10.1 U1.37 | length 8.1
  Top Layer w0.2: v1(25,35.5) 25.061,35.5 25.989,36.428 25.989,36.992 R10.1 ; U1.37 26.497,31.81 27.379,32.692 v1(27.379,32.713)
  Bottom Layer w0.2: v1(25,35.5) 25,34.262 26.549,32.713 v1(27.379,32.713)
VCC: CN6.1 CN8.1 Q3.2 Q5.2 R42.1 R44.1 | length 29.3
  Top Layer w0.4: v1@48.802,13.687 48.802,7.261 CN8.1 ; Q5.2 Q5.2@56.173,20.52 ; R42.1 56.197,18.996 56.197,20.496 Q5.2@56.173,20.52 ; v1(57.966,17.15) 57.966,17.2 59.527,18.762 59.527,20.527 ; Q3.2 59.527,20.527 ; Q5.2@56.173,20.52 R44.1 59.521,20.52 59.527,20.527
  Bottom Layer w0.4: v1(48.791,13.687) 54.453,13.687 57.916,17.15 v1(57.966,17.15)
VDD: BZ1.1 C3.2 C4.2 C5.2 C6.2 C7.2 CN2.1 CN3.1 CN7.3 CN9.1 CN14.1 D1.1 D3.1 L1.1 Q5.3 R1.2 R2.1 R11.1 R34.2 | length 176.7
  Top Layer w0.2: R1.2@44.751,42.628 v1@46.667,42.628
  Top Layer w0.4: CN14.1 7.579,32.222 8.21,32.854 C4.2 ; CN7.3@4.902,26.129 v1(12.614,26.129) ; C4.2@8.235,33.939 C5.2 ; C5.2@10.01,33.939 C6.2 ; C6.2@11.781,33.96 C7.2@13.508,33.96 ; C7.2@13.511,33.94 14.837,33.94 15.164,34.267 15.164,34.364 v1(15.222,34.421) 15.222,35.657 ; R11.1 15.956,15.471 R34.2 16.002,17.528 16.263,17.789 v1(18.206,17.789) 18.251,17.834 18.251,21.147 v1(18.281,21.177) ; D1.1 15.222,38.096 ; 15.225,37.996 15.225,35.973 15.222,35.973 15.222,35.657 ; v1(15.693,29.764) 15.75,29.822 15.75,30.485 16.285,31.02 L1.1 ; R2.1 19.222,35.891 18.987,35.657 15.222,35.657 ; CN2.1@35.411,7.279 35.375,7.316 35.375,9.922 v1(35.364,9.933) 35.364,10.014 35.45,10.1 C3.2 35.45,14.5 35.474,14.524 35.474,15.224 36.763,16.513 BZ1.1 ; v1(38.744,23.752) 38.744,23.094 36.766,21.116 36.766,18.344 36.763,18.341 BZ1.1 ; R1.2 R1.2@44.751,42.628 ; D3.1 43.961,20.155 41.947,18.141 BZ1.1 ; v1@46.667,42.628 v1(46.704,42.664) ; CN9.1@50.702,30.502 CN9.1 ; Q5.3 v1(55.222,24.221)
  Bottom Layer w0.2: 46.714,33.906 v1@46.714,42.654
  Bottom Layer w0.4: CN3.1 5.131,9.936 35.361,9.936 v1(35.364,9.933) ; CN7.3@4.902,26.129 CN7.3@4.92,26.147 ; v1(12.614,26.129) 14.203,26.129 14.221,26.147 ; v1(15.222,34.421) 17.598,34.421 20.022,31.997 20.022,30.421 19.347,29.746 v1@15.711,29.746 ; v1@15.627,29.764 14.221,28.359 14.221,26.147 ; 18.206,9.971 v1(18.206,17.789) ; v1(18.281,21.177) 16.466,21.177 14.221,23.421 14.221,26.147 ; BZ1.1 BZ1.1@36.844,18.222 ; v1(38.744,23.752) 41.161,26.169 41.161,32.038 43.03,33.906 46.714,33.906 46.714,32.22 48.526,30.409 50.609,30.409 CN9.1 50.78,30.463 53.729,30.463 55.238,28.954 v1@55.238,24.238
VDD/VDDA: C9.2 C10.2 C11.2 L1.2 U1.4 U1.5 U1.6 | length 10.2
  Top Layer w0.254: U1.6 18.62,27.221 18.472,27.37 18.472,27.721 ; U1.5 18.472,27.721 ; U1.4 18.62,28.221 18.472,28.072 18.472,27.771 18.472,27.721
  Top Layer w0.4: C11.2@13.955,27.878 C11.2 15.597,27.778 C9.2 15.654,27.778 17.211,27.778 C10.2 17.3,27.867 L1.2@17.3,29.419 ; C10.2@17.277,27.771 18.472,27.771
VIN: CN6.2 CN8.2 Q6.3 R42.2 R43.2 | length 27.4
  Top Layer w0.2: CN8.2 46.302,11.181 CN6.2@46.342,11.221 ; CN6.2 46.282,11.241 46.282,13.281 50.472,17.471 R43.2 R42.2 56.262,17.431 56.262,16.421 56.782,15.901 57.641,15.901 60.602,12.94 60.602,10.249 Q6.3
pads on no net: U1.1 U1.2 U1.3 U1.8 U1.9 U1.18 U1.29 U1.31 U1.33 U1.40 U1.41

## Polygon pours and split planes (outlines as drawn)
GND on Bottom Layer "GND_L02_P000" (solid, remove dead copper, pour order 0): 3,45.5 63.5,45.5 63.5,5 3,5
GND on Top Layer "GND_L01_P002" (solid, remove dead copper, pour order 2): 3.004,45.507 63.504,45.507 63.504,5.007 3.004,5.007

## Silkscreen, mask and mechanical layers (free items; w line width, h text height)
Bottom Overlay:
  drawing of 106 lines, arcs and shapes, not listed
  text "GND" at 49.101,43.143 h0.5
  text "GND" at 38.69,41.564 h0.5
  text "PIN" at 33.853,41.541 h0.5
  text "RST" at 41.197,41.549 h0.5
  text "GND" at 31.387,41.533 h0.5
  text "GND" at 10.008,41.362 h0.5
  text "SWDIO" at 8.119,41.335 h0.5
  text "SWCLK" at 12.893,41.355 h0.5
  text "VDD" at 15.005,41.335 h0.5
  text "-" at 59.321,40.88 h0.5
  text "+" at 56.776,40.856 h0.5
  text "SS" at 49.205,40.371 h0.5
  text "GND" at 8.004,39.479 h0.5
  text "SCK" at 49.204,37.871 h0.5
  text "TX" at 8.027,37.063 h0.5
  text "MOSI" at 49.1,35.42 h0.5
  text "RX" at 7.945,34.506 h0.5
  text "MISO" at 49.147,32.831 h0.5
  text "VDD" at 8.003,31.898 h0.5
  text "VDD" at 49.049,30.135 h0.5
  text "GND" at 7.904,28.479 h0.5
  text "Trash Fullness Sensor 1.0" at 46.194,27.17 h1.2
  text "VDD" at 7.938,26.021 h0.5
  text "Rev 0" at 20.327,25.701 h0.6
  text "PIN" at 49.323,23.753 h0.5
  text "SCL" at 7.845,23.506 h0.5
  text "GND" at 49.382,21.221 h0.5
  text "SDA" at 7.903,20.898 h0.5
  text "GND" at 60.088,20.444 h0.5
  text "M" at 59.593,17.992 h0.5
  text "GND" at 8.08,17.736 h0.5
  text "ADC2" at 29.554,16.647 h0.5
  text "S" at 59.593,15.385 h0.5
  text "TX" at 8.113,15.278 h0.5
  text "ADC1" at 29.581,14.061 h0.5
  text "RX" at 8.021,12.763 h0.5
  text "GND" at 39.383,12.46 h0.5
  text "TX" at 41.617,12.459 h0.5
  text "RX" at 44.123,12.472 h0.5
  text "VIN" at 46.883,12.459 h0.5
  text "VCC" at 49.487,12.459 h0.5
  text "GND" at 29.505,11.423 h0.5
  text "VDD" at 8.079,10.156 h0.5
  text "SFedU" at 59.006,5.937 h0.8
  text "GND" at 25.804,5.571 h0.5
  text "ECHO" at 31.238,5.571 h0.5
  text "TRIG" at 33.796,5.571 h0.5
  text "INPUT" at 28.763,5.56 h0.5
  text "GND" at 8.612,5.499 h0.5
  text "VDD" at 36.004,5.471 h0.5
  text "PIN" at 11.077,5.423 h0.5
  text "GND" at 15.555,5.437 h0.5
  text "PIN" at 18.092,5.418 h0.5
Body:
  the board outline again, w0.2